# Altium PCB Headstage.PcbDoc
Units mil, origin at the board's own origin, x right, y up, seen from the top; angles counter-clockwise.
Board outline 4600 x 4600 mil, 4 copper layers (Top Copper Layer, Internal Copper Layer 1, Internal Copper Layer 2, Bottom Copper Layer), stack 62.205 mil thick; 15 components, 96 nets, 242 pads, 19 vias.
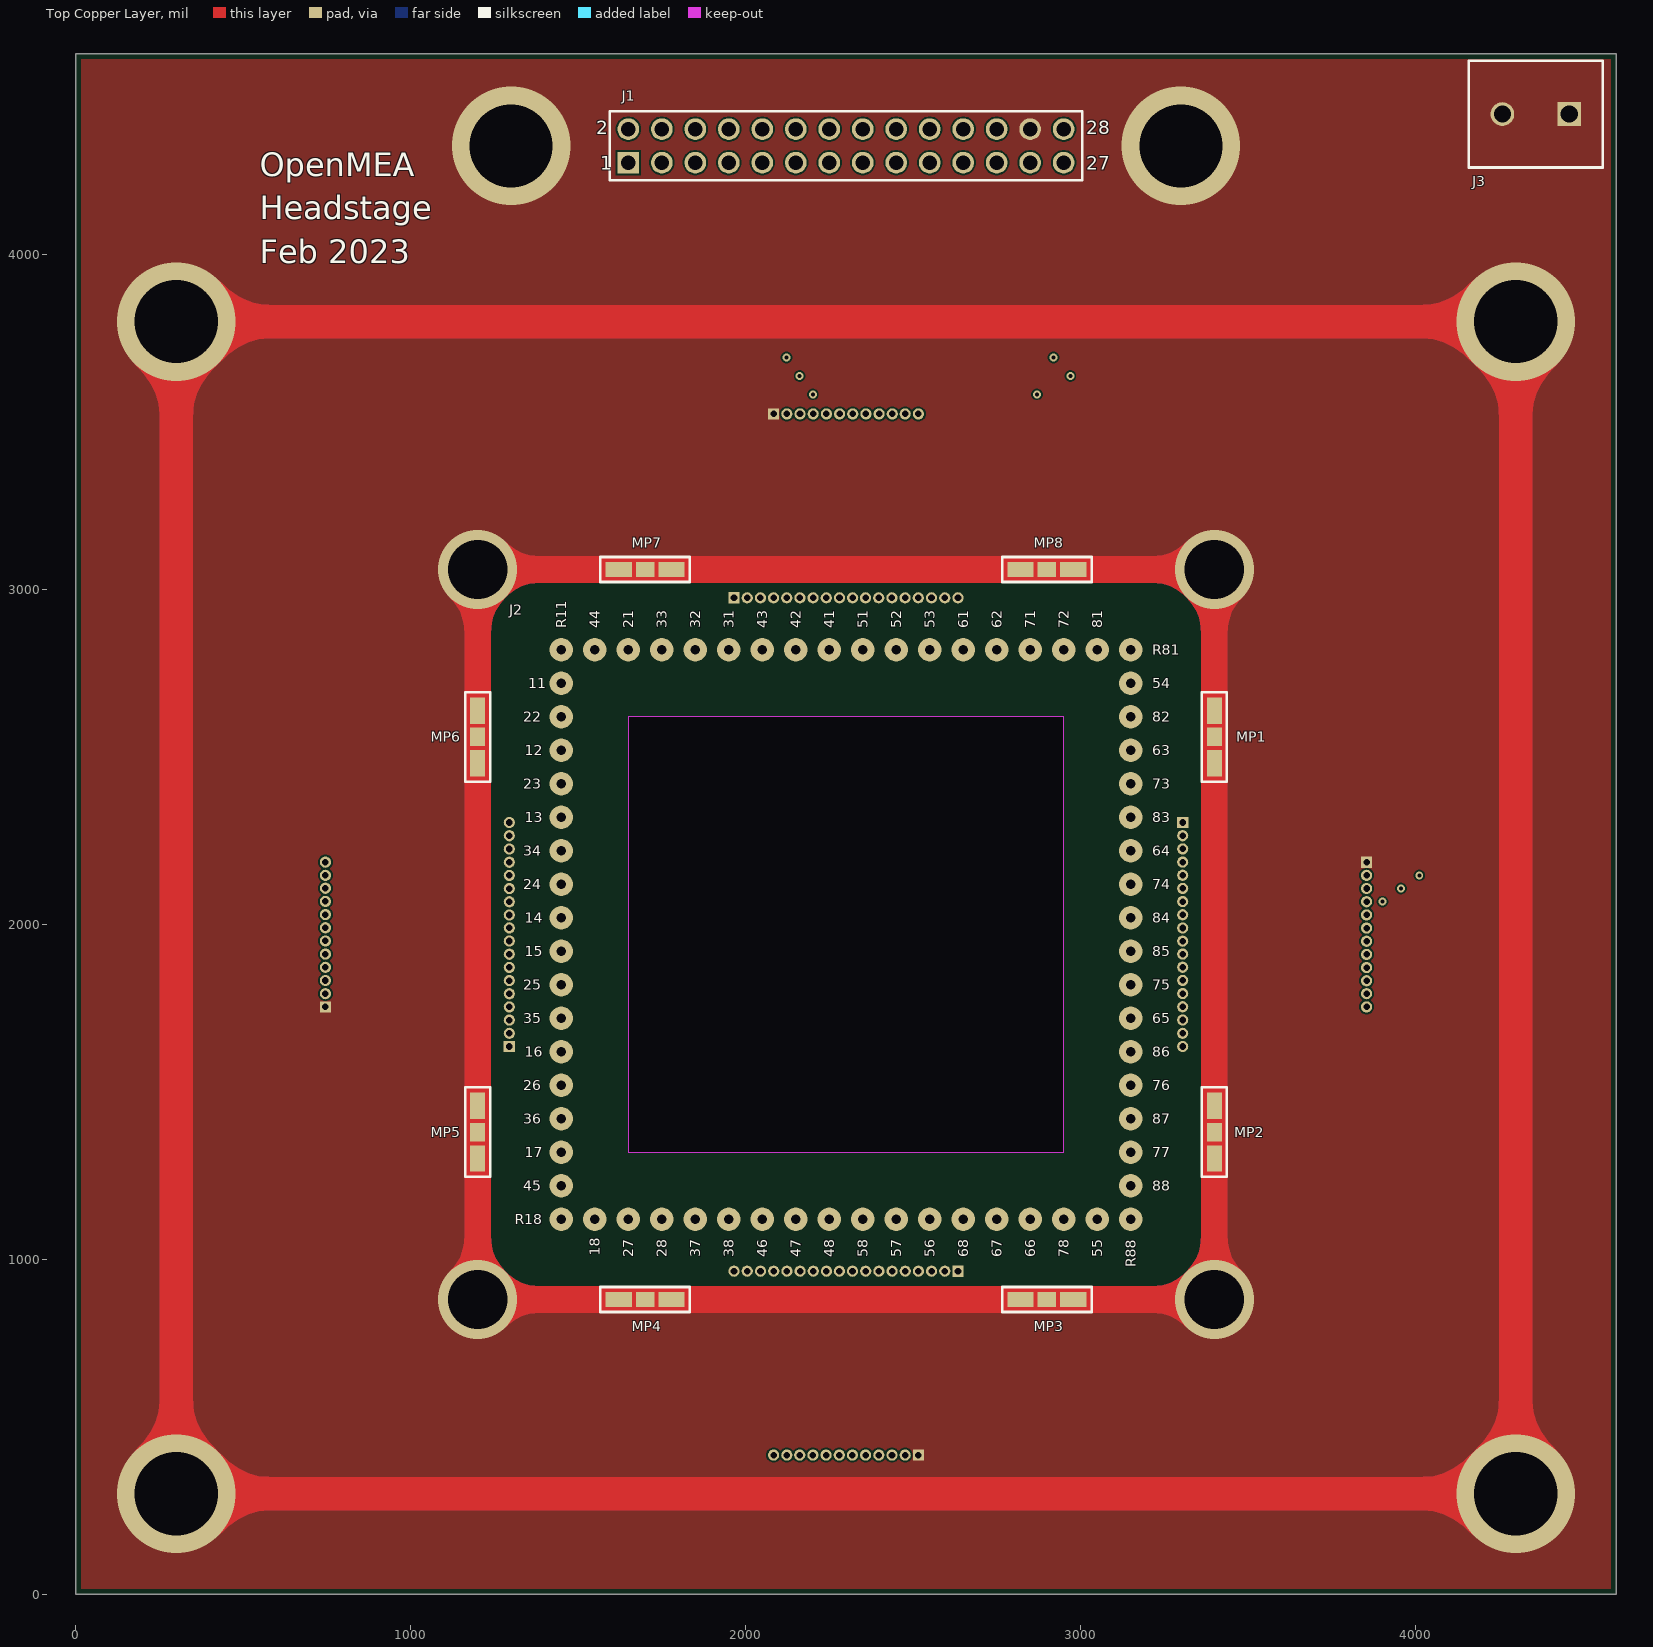
[diagram p0: Top Copper Layer view]
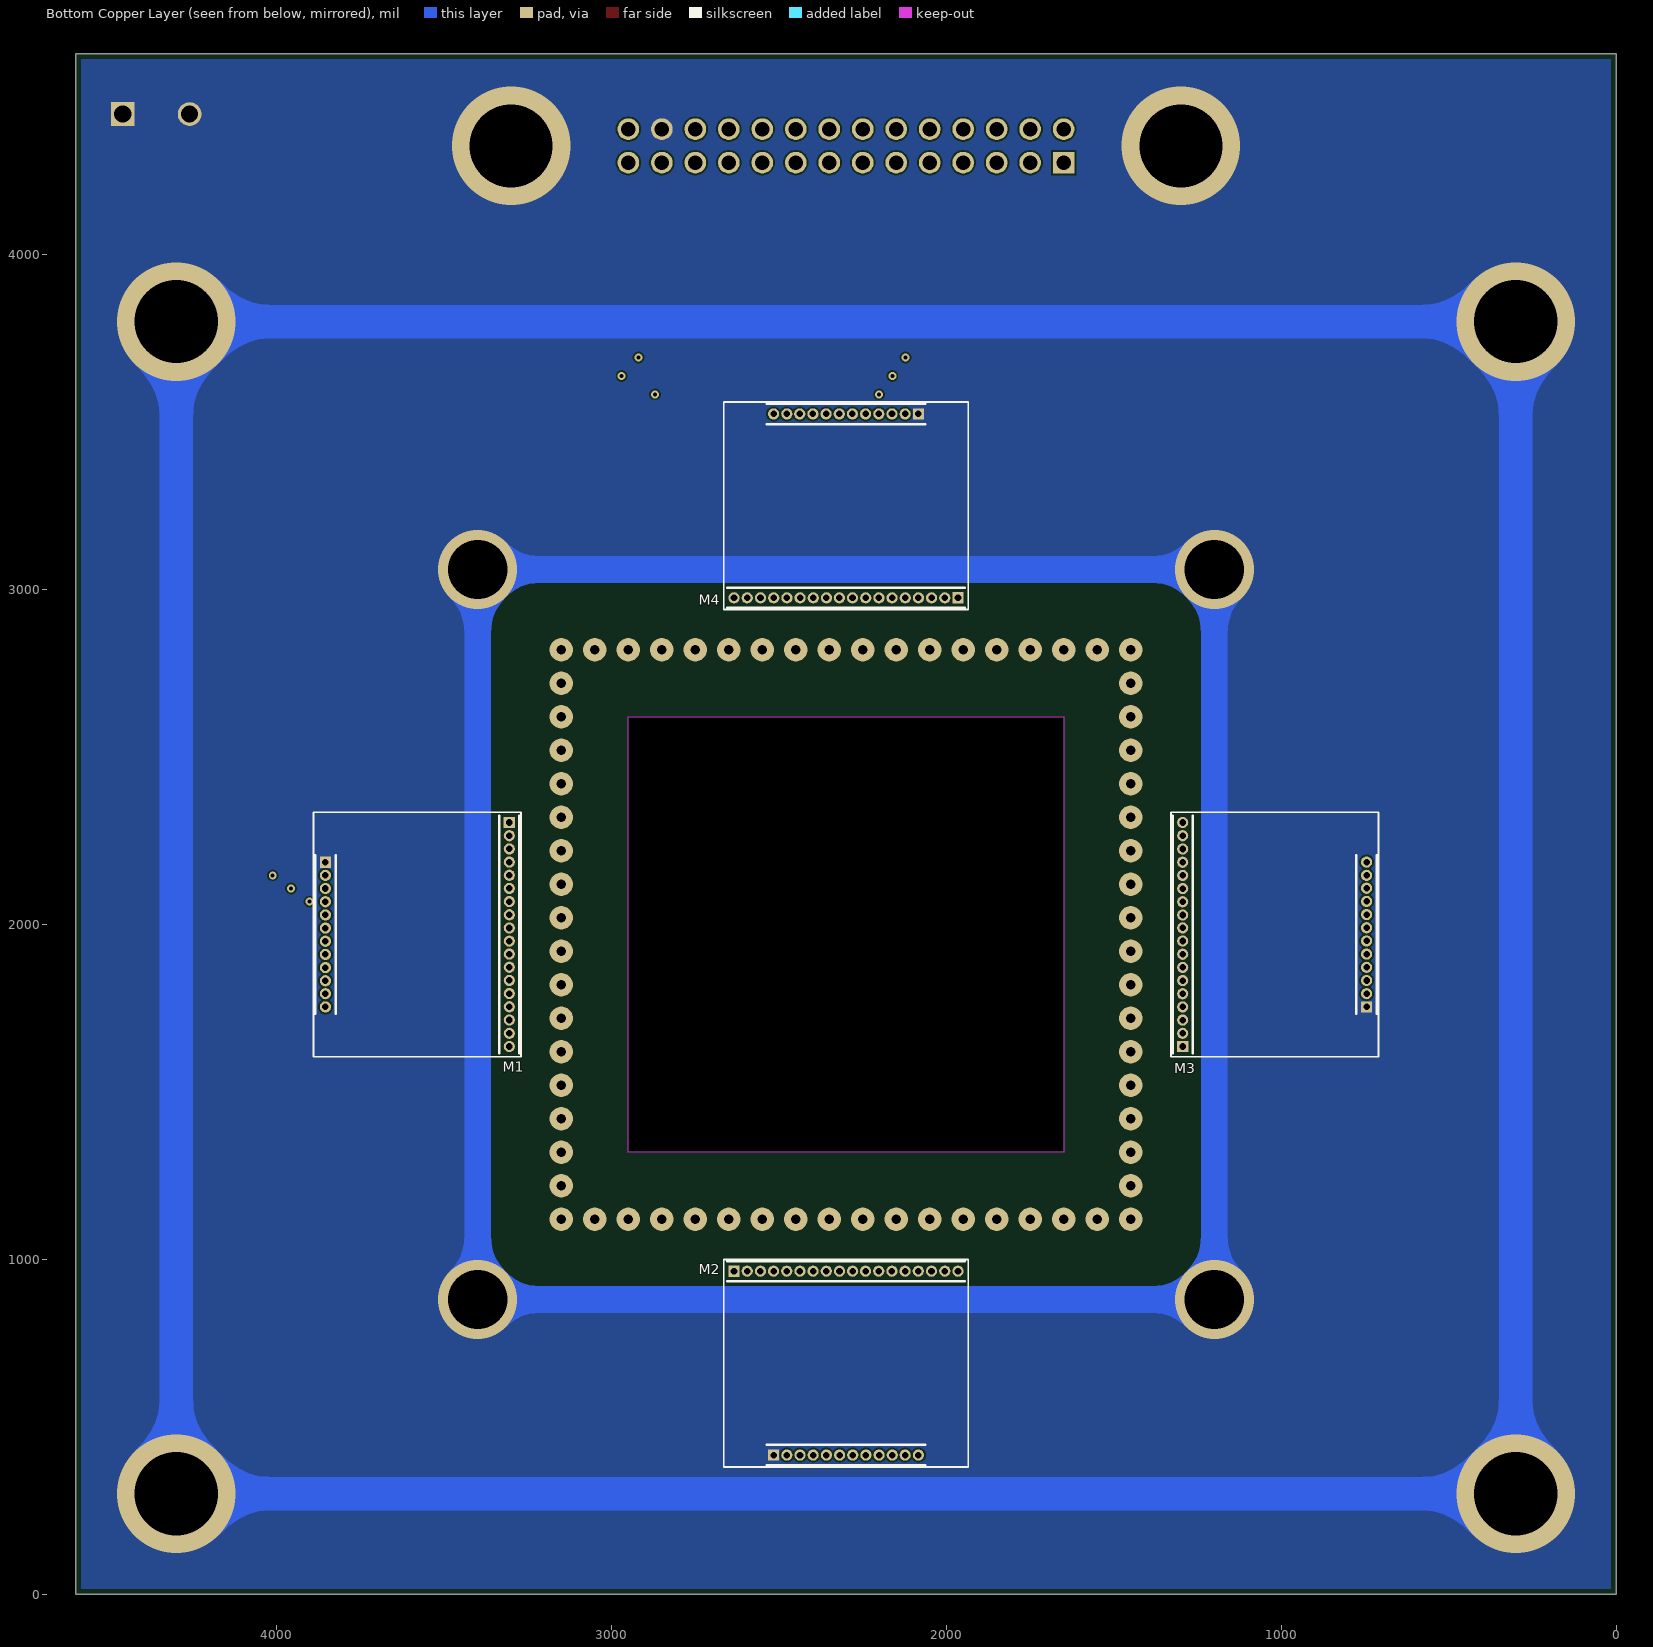
[diagram p1: Bottom Copper Layer view, seen from below]
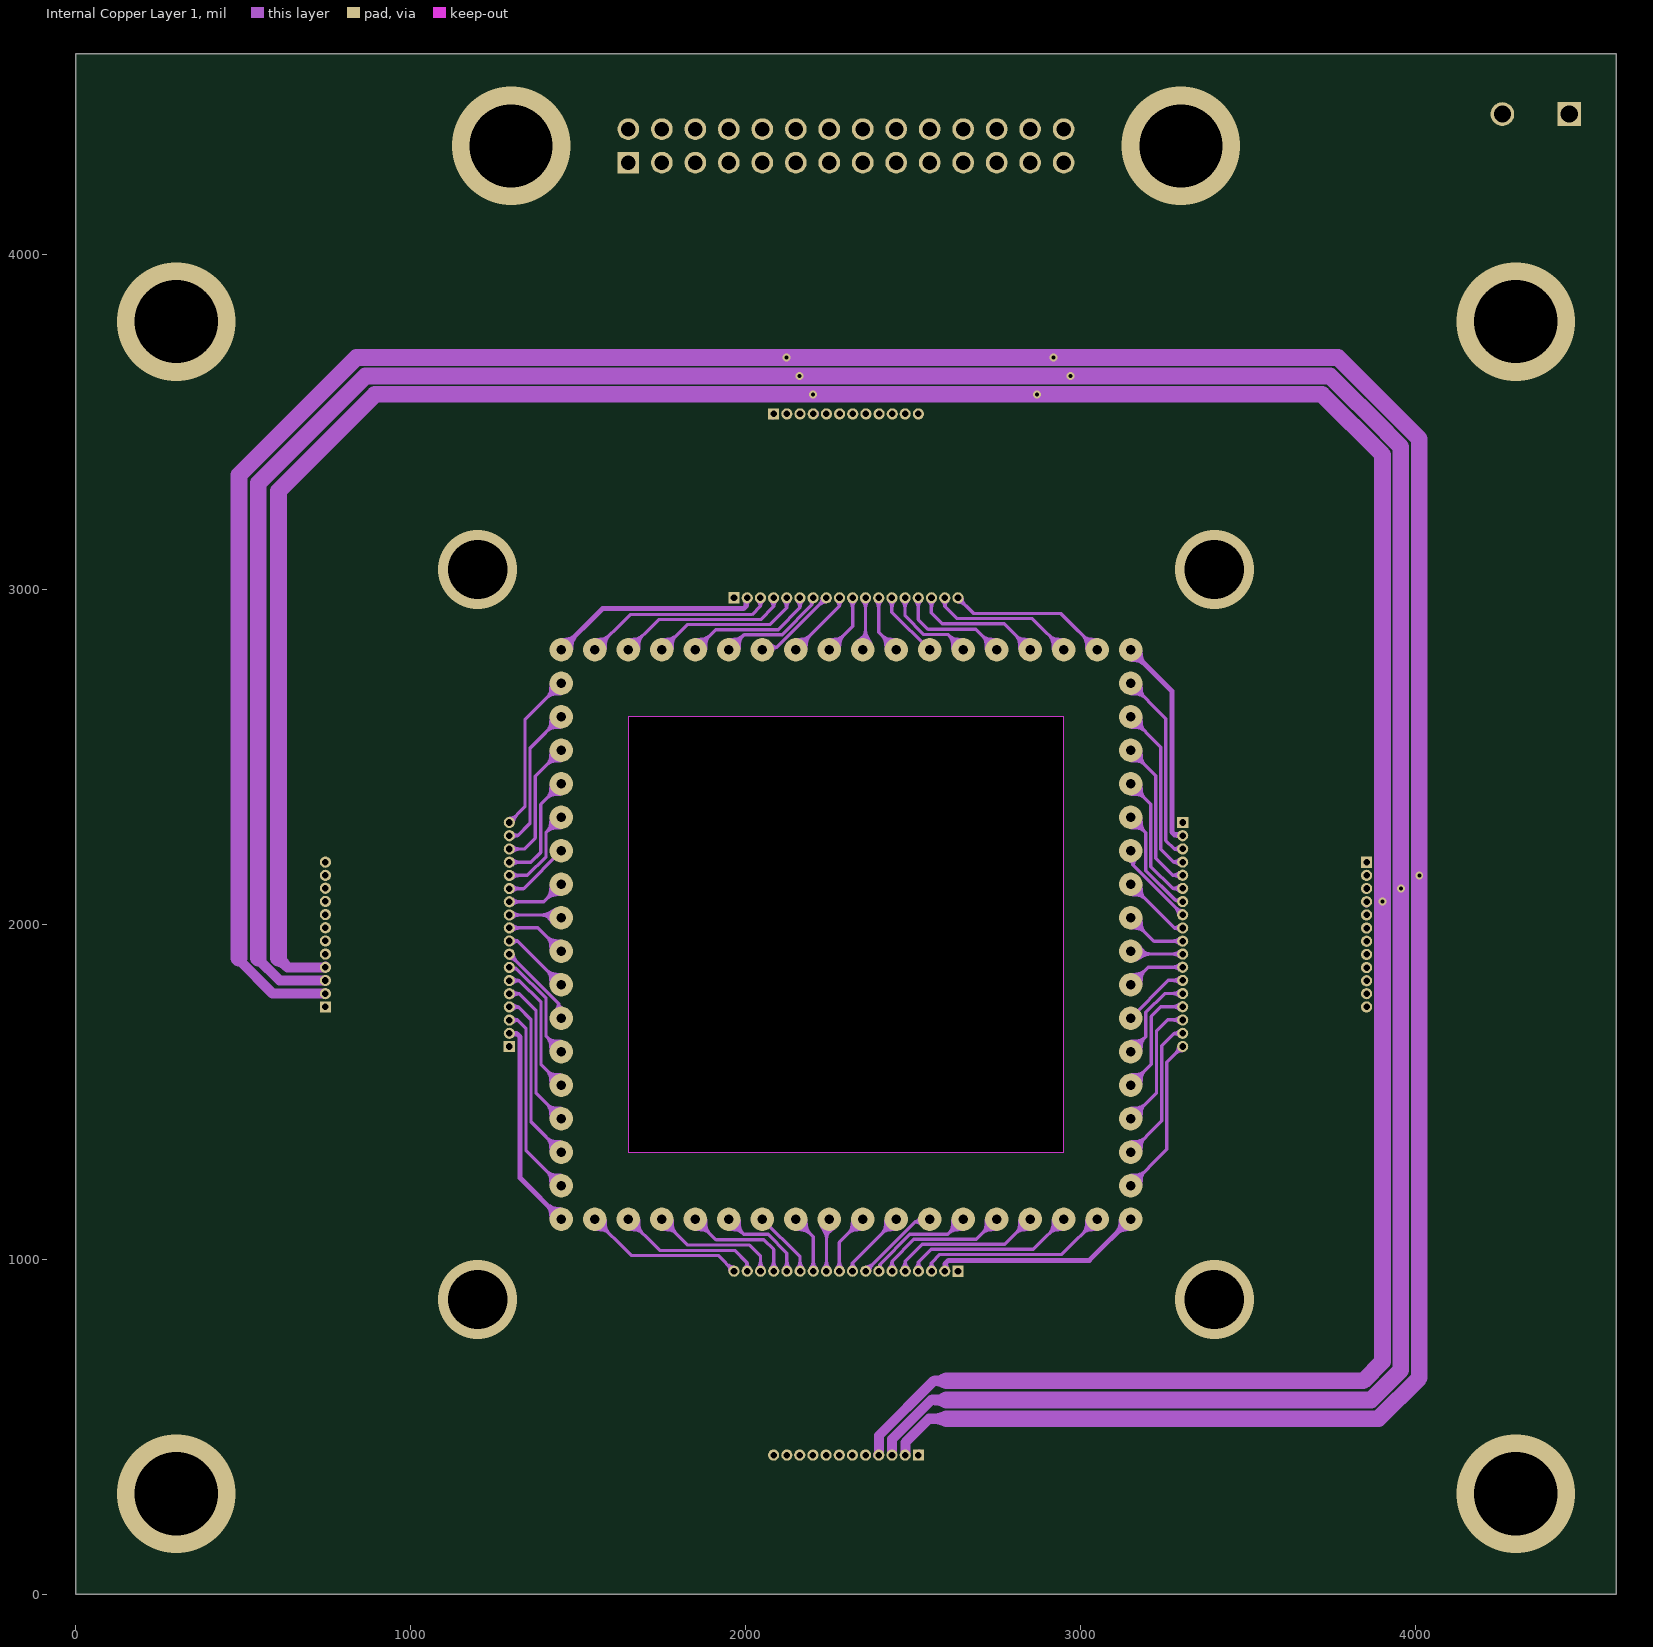
[diagram p2: Internal Copper Layer 1]
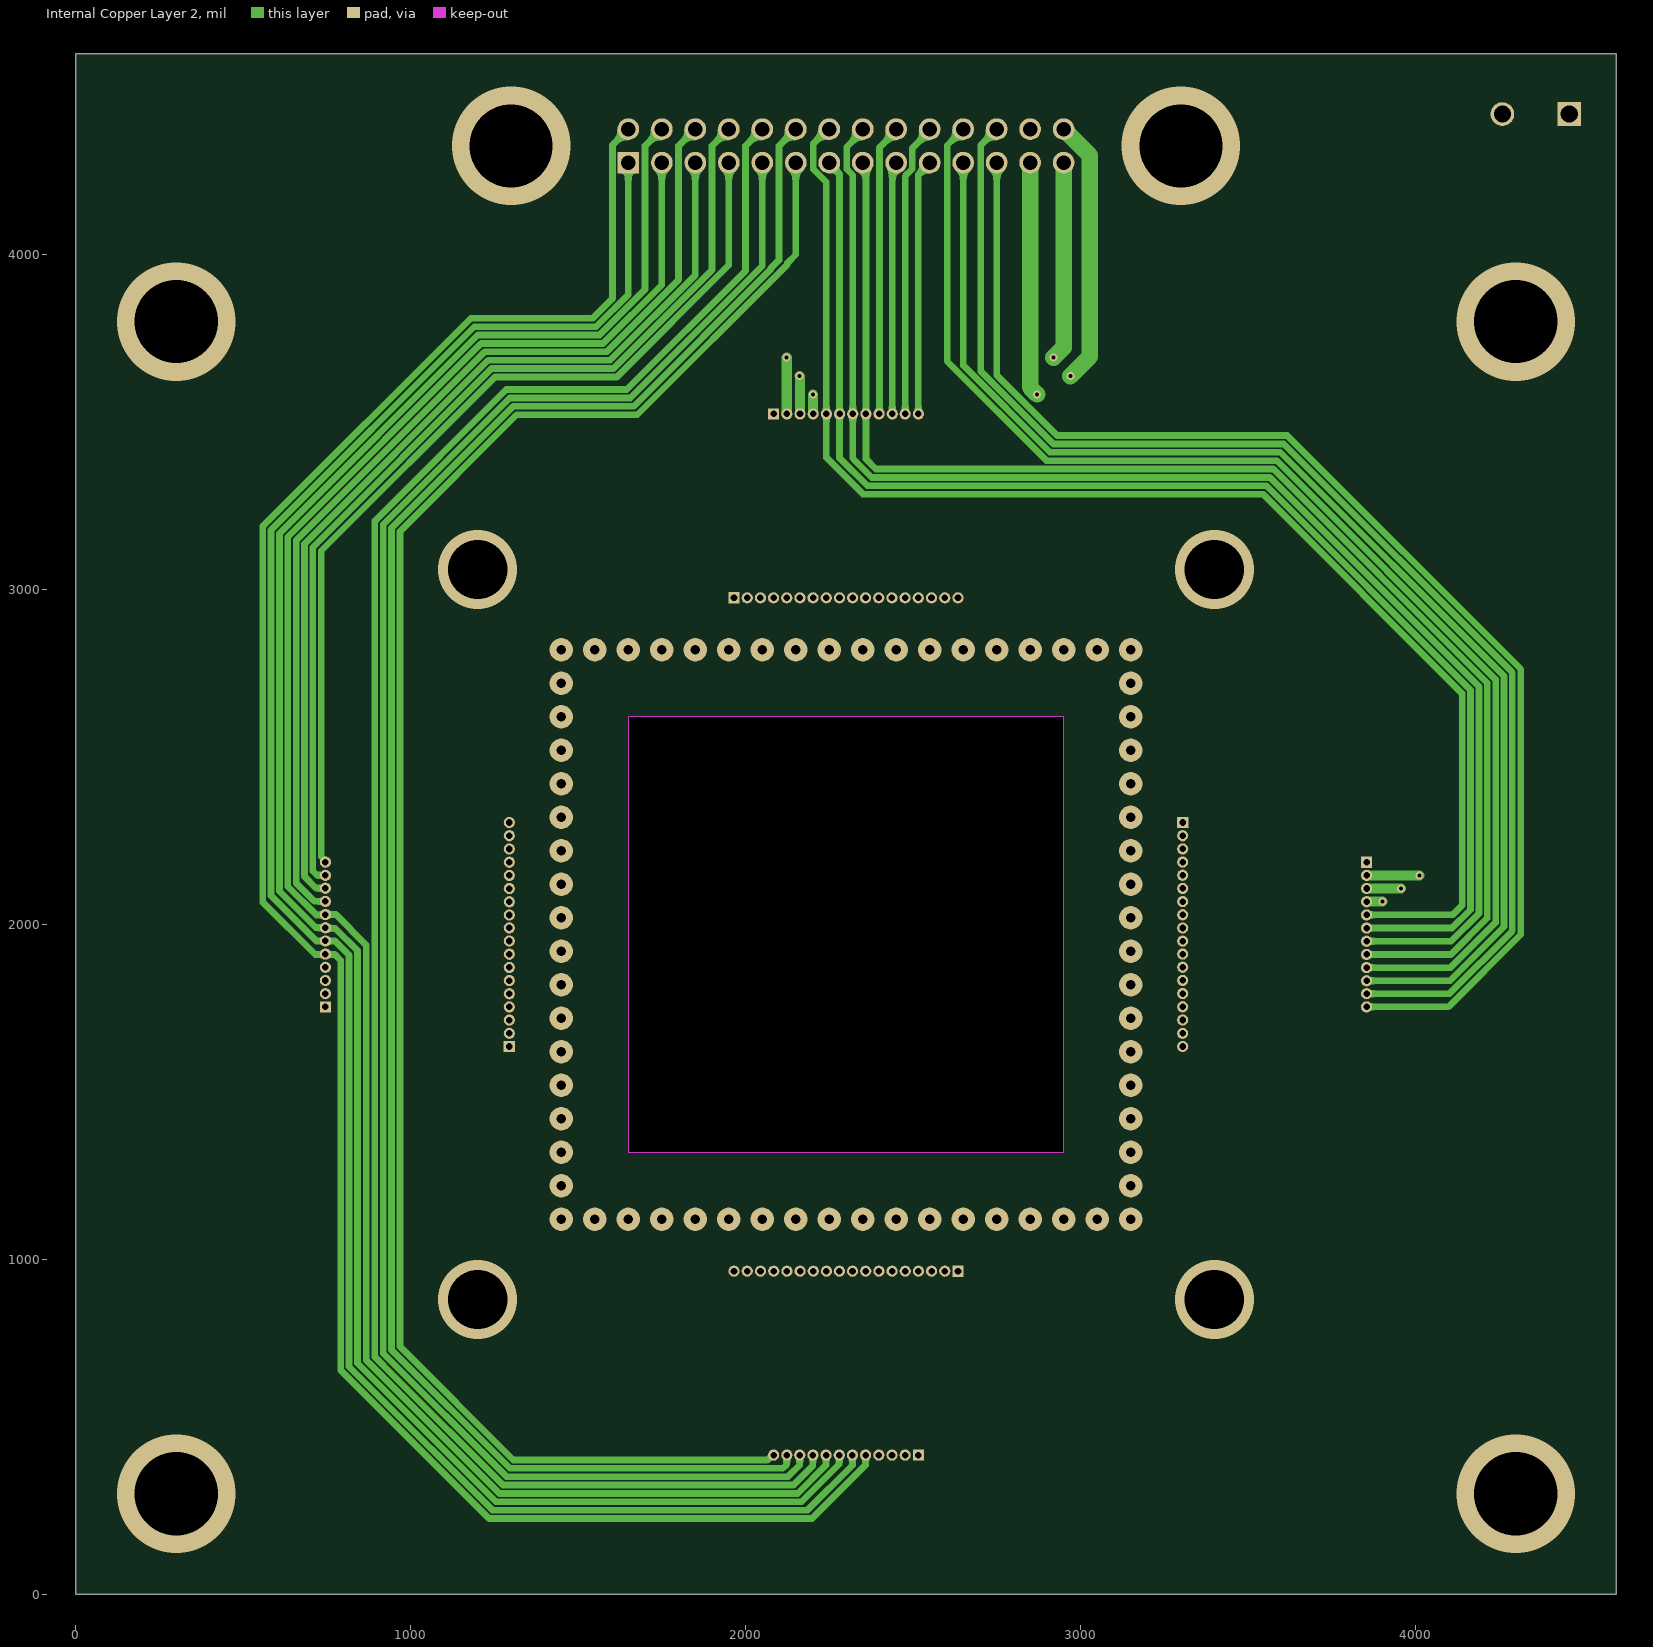
[diagram p3: Internal Copper Layer 2]

## Layer stack, top to bottom
Top Solder: solder mask 0.3937, Solder Resist, Dk 3.5
Top Copper Layer: signal copper 1.378
Dielectric 1: prepreg 8.6614, FR-4, Dk 4.2
Internal Copper Layer 1: signal copper 1.378
Dielectric 2: core 39.3701, FR-4, Dk 4.2
Internal Copper Layer 2: signal copper 1.378
Dielectric 3: prepreg 8.6614, FR-4, Dk 4.2
Bottom Copper Layer: signal copper 1.378
Bottom Solder: solder mask 0.3937, Solder Resist, Dk 3.5

## Board outline
0,0 4600,0 4600,4600 0,4600
cut-out: 2950,2620 1650,2620 1650,1320 2950,1320

## Design rules (kind name [scope] priority, off if disabled: settings)
BoardOutlineClearance [All] p1: gap=15.75 ignorepadtopadclearanceinfootprint=FALSE
Clearance [All] p1: gap=5 ignorepadtopadclearanceinfootprint=TRUE
ComponentClearance [All] p1: gap=5.91 collisioncheckmode=3 verticalgap=5.91 showdistances=FALSE
HoleSize [All] p1: absolutevalues=TRUE maxlimit=248.03 minlimit=9.84 maxpercent=80.000 minpercent=20.000
HoleToHoleClearance [All] p1: gap=17.72 allowstackedmicrovias=TRUE
MinimumAnnularRing [All] p1: minimumring=5.91
MinimumSolderMaskSliver [All] p1: minsoldermaskwidth=5.91
PlaneClearance [All] p1: clearance=5.91
PlaneConnect [All] p1: planeconnectstyle=Relief reliefexpansion=9.84 reliefentries=4 reliefconductorwidth=5.91 reliefairgap=5.91
PolygonConnect [All] p1: connectstyle=Direct reliefconductorwidth=5.91 reliefentries=4 polygonreliefangle="90 Angle" airgapwidth=5.91
RoomDefinition Headstage [InComponentClass('Headstage')] p1 off: confinementstyle=ConfineIn formatcopy=TRUE lockcomponents=FALSE outline 0,0 2000,0 2000,1000 0,1000
RoutingVias [All] p1: holewidth=9.84 width=21.65 viastyle="Through Hole" minholewidth=9.84 minwidth=21.65 maxholewidth=248.03 maxwidth=354.33
SilkToSilkClearance [All] p1: silktosilkclearance=5
SilkToSolderMaskClearance [IsPad] p1: minsilkscreentomaskgap=7.87 clearancetoexposedcopper=TRUE
SolderMaskExpansion [All] p1: expansion=5.91 istentingtop=FALSE
Width [All] p1: maxlimit=1968.5 minlimit=5.91 preferedwidth=5.91
22 further rules are at their usual default settings.

## Components (designator, comment, footprint, x,y, rotation, side; value= is the part's Value field where it differs from the comment)
J1 "61302821121" 61302821121 2300,4325 r0 top
J2 "POGO_PINS_64_4_V01" POGO_PINS_64_4_V01 2300,1970 r0 top locked
J3 "1729128" PHOE-1729128-2_V 4360,4420 r180 top
M1 "Intan_RHS2116_Module" INTAN_RHS2116_MODULE#1 3580,1970 r270 bottom locked
M2 "Intan_RHS2116_Module" INTAN_RHS2116_MODULE#2 2300,690 r180 bottom locked
M3 "Intan_RHS2116_Module" INTAN_RHS2116_MODULE#2 1020,1970 r90 bottom locked
M4 "Intan_RHS2116_Module" INTAN_RHS2116_MODULE#3 2300,3250 r0 bottom
MP1 "S0971-46R" FP-S0971-46R-MFG 3400,2560 r90 top locked
MP2 "S0971-46R" FP-S0971-46R-MFG 3400,1380 r90 top locked
MP3 "S0971-46R" FP-S0971-46R-MFG 2900,880 r180 top locked
MP4 "S0971-46R" FP-S0971-46R-MFG 1700,880 r180 top locked
MP5 "S0971-46R" FP-S0971-46R-MFG 1200,1380 r90 top locked
MP6 "S0971-46R" FP-S0971-46R-MFG 1200,2560 r90 top locked
MP7 "S0971-46R" FP-S0971-46R-MFG 1700,3060 r180 top locked
MP8 "S0971-46R" FP-S0971-46R-MFG 2900,3060 r180 top locked

## Footprints (in the part's own frame and the unit in brackets; to place one, negate y for a bottom-side part, rotate by r counter-clockwise, add the part's x,y. Pads: shape width x height; smd on the part's side, far side on the other; paste and mask are expansions set on the pad)
61302821121 [mm] "Pin Header, pitch 2.54 mm, THT, Vertical, dual row, 28p"
  rect 1.65x1.65 hole 1.1: 1(-16.51,-1.27)
  round 1.65 hole 1.1: 2(-16.51,1.27) 3(-13.97,-1.27) 4(-13.97,1.27) 5(-11.43,-1.27) 6(-11.43,1.27) 7(-8.89,-1.27) 8(-8.89,1.27) 9(-6.35,-1.27) 10(-6.35,1.27) 11(-3.81,-1.27) 12(-3.81,1.27) 13(-1.27,-1.27) 14(-1.27,1.27) 15(1.27,-1.27) 16(1.27,1.27) 17(3.81,-1.27) 18(3.81,1.27) 19(6.35,-1.27) 20(6.35,1.27) 21(8.89,-1.27) 22(8.89,1.27) 23(11.43,-1.27) 24(11.43,1.27) 25(13.97,-1.27) 26(13.97,1.27) 27(16.51,-1.27) 28(16.51,1.27)
  silkscreen extent -17.93,-2.62 17.93,2.62, body extent -17.78,-2.54 17.78,2.54, height 8.59
FP-S0971-46R-MFG [mm]
  rect 2x1.125 smd paste+0 mask+0: 1(-2,0) 1(2,0)
  rect 1.4x1.125 smd paste+0 mask+0: 1(0,0)
  silkscreen extent -3.4,-0.95 3.4,0.95, body extent -3.1,-0.66 3.1,0.66, height 0.25
INTAN_RHS2116_MODULE#1 [mm]
  rect 0.85x0.85 hole 0.5: 1(-5.488,-6.974) 13(-8.494,6.975)
  round 0.85 hole 0.5: 2(-4.488,-6.974) 3(-3.488,-6.974) 4(-2.488,-6.974) 5(-1.488,-6.974) 6(-0.488,-6.974) 7(0.512,-6.974) 8(1.512,-6.974) 9(2.512,-6.974) 10(3.512,-6.974) 11(4.489,-6.974) 12(5.489,-6.974) 14(-7.494,6.975) 15(-6.494,6.975) 16(-5.494,6.975) 17(-4.494,6.975) 18(-3.494,6.975) 19(-2.494,6.975) 20(-1.494,6.975) 21(-0.494,6.975) 22(0.506,6.975) 23(1.483,6.975) 24(2.483,6.975) 25(3.483,6.975) 26(4.483,6.975) 27(5.483,6.975) 28(6.483,6.975) 29(7.494,6.975) 30(8.494,6.975)
  Top Copper Layer lines w0.254: 5.483,6.975 5.463,6.955 ; 4.483,6.975 4.483,6.884 ; 1.483,6.975 1.483,6.813 ; -0.494,6.975 -0.38,6.86
  Top Copper Layer lines w0.381: 1.467,-6.885 1.534,-6.952 ; 0.467,-6.885 0.534,-6.952 ; -0.443,-6.892 -0.443,-6.974 ; -1.443,-6.892 -1.443,-6.974 ; 3.526,-6.944 3.534,-6.952 3.557,-6.974 ; 1.557,-6.974 1.534,-6.952 ; 0.557,-6.974 0.534,-6.952 ; 1.534,-6.952 1.534,-6.952 ; 0.534,-6.952 0.534,-6.952
  Internal Copper Layer 1 lines w0.635: -5.551,-6.867 -5.466,-6.952 -5.443,-6.974 ; -3.443,-6.916 -3.443,-6.974 ; -4.484,-6.933 -4.466,-6.952 ; -4.443,-6.974 -4.466,-6.952 ; -4.466,-6.952 -4.466,-6.952 ; -4.466,-6.952 -4.466,-6.952
  Internal Copper Layer 1 lines w0.762: -2.46,-6.958 -2.443,-6.974
  silkscreen extent -9.27,-7.88 9.27,7.86, body extent -9.27,-7.88 9.27,7.86, height 3.2
INTAN_RHS2116_MODULE#2 [mm]
  rect 0.85x0.85 hole 0.5: 1(-5.488,-6.974) 13(-8.494,6.975)
  round 0.85 hole 0.5: 2(-4.488,-6.974) 3(-3.488,-6.974) 4(-2.488,-6.974) 5(-1.488,-6.974) 6(-0.488,-6.974) 7(0.512,-6.974) 8(1.512,-6.974) 9(2.512,-6.974) 10(3.512,-6.974) 11(4.489,-6.974) 12(5.489,-6.974) 14(-7.494,6.975) 15(-6.494,6.975) 16(-5.494,6.975) 17(-4.494,6.975) 18(-3.494,6.975) 19(-2.494,6.975) 20(-1.494,6.975) 21(-0.494,6.975) 22(0.506,6.975) 23(1.483,6.975) 24(2.483,6.975) 25(3.483,6.975) 26(4.483,6.975) 27(5.483,6.975) 28(6.483,6.975) 29(7.494,6.975) 30(8.494,6.975)
  Top Copper Layer lines w0.254: 5.483,6.975 5.463,6.955 ; 4.483,6.884 4.483,6.975 ; 1.483,6.813 1.483,6.975 ; -0.38,6.86 -0.494,6.975
  Top Copper Layer lines w0.381: 3.557,-6.974 3.534,-6.952 ; 3.526,-6.944 3.534,-6.952 ; 1.557,-6.974 1.534,-6.952 ; 1.467,-6.885 1.534,-6.952 ; 0.557,-6.974 0.534,-6.952 ; 0.467,-6.885 0.534,-6.952 ; -0.443,-6.974 -0.443,-6.892 ; -1.443,-6.974 -1.443,-6.892 ; 3.534,-6.952 3.534,-6.952 ; 1.534,-6.952 1.534,-6.952 ; 0.534,-6.952 0.534,-6.952
  Internal Copper Layer 1 lines w0.635: -3.443,-6.974 -3.443,-6.916 ; -4.443,-6.974 -4.466,-6.952 ; -4.484,-6.933 -4.466,-6.952 ; -5.443,-6.974 -5.466,-6.952 -5.551,-6.867 ; -4.466,-6.952 -4.466,-6.952
  Internal Copper Layer 1 lines w0.762: -2.443,-6.974 -2.46,-6.958
  silkscreen extent -9.27,-7.88 9.27,7.86, body extent -9.27,-7.88 9.27,7.86, height 3.2
INTAN_RHS2116_MODULE#3 [mm]
  rect 0.85x0.85 hole 0.5: 1(-5.488,-6.974) 13(-8.494,6.975)
  round 0.85 hole 0.5: 2(-4.488,-6.974) 3(-3.488,-6.974) 4(-2.488,-6.974) 5(-1.488,-6.974) 6(-0.488,-6.974) 7(0.512,-6.974) 8(1.512,-6.974) 9(2.512,-6.974) 10(3.512,-6.974) 11(4.489,-6.974) 12(5.489,-6.974) 14(-7.494,6.975) 15(-6.494,6.975) 16(-5.494,6.975) 17(-4.494,6.975) 18(-3.494,6.975) 19(-2.494,6.975) 20(-1.494,6.975) 21(-0.494,6.975) 22(0.506,6.975) 23(1.483,6.975) 24(2.483,6.975) 25(3.483,6.975) 26(4.483,6.975) 27(5.483,6.975) 28(6.483,6.975) 29(7.494,6.975) 30(8.494,6.975)
  Top Copper Layer lines w0.254: -0.494,6.975 -0.38,6.86 ; 1.483,6.975 1.483,6.813 ; 4.483,6.975 4.483,6.884 ; 5.463,6.955 5.483,6.975
  Top Copper Layer lines w0.381: -1.443,-6.892 -1.443,-6.974 ; -0.443,-6.892 -0.443,-6.974 ; 0.467,-6.885 0.534,-6.952 ; 0.557,-6.974 0.534,-6.952 ; 1.467,-6.885 1.534,-6.952 ; 1.557,-6.974 1.534,-6.952 ; 3.526,-6.944 3.534,-6.952 ; 3.557,-6.974 3.534,-6.952 ; 0.534,-6.952 0.534,-6.952 ; 1.534,-6.952 1.534,-6.952 ; 3.534,-6.952 3.534,-6.952
  Internal Copper Layer 1 lines w0.635: -5.551,-6.867 -5.466,-6.952 -5.443,-6.974 ; -4.484,-6.933 -4.466,-6.952 -4.443,-6.974 ; -3.443,-6.916 -3.443,-6.974
  Internal Copper Layer 1 lines w0.762: -2.46,-6.958 -2.443,-6.974
  silkscreen extent -9.27,-7.88 9.27,7.86, body extent -9.27,-7.88 9.27,7.86, height 3.2
PHOE-1729128-2_V [mm] "Receptacle, 2-Leads, Body 8.1x10.16mm, Pitch 5.08mm"
  rect 1.8x1.8 hole 1.3: 1(-2.54,0)
  round 1.8 hole 1.3: 2(2.54,0)
  silkscreen extent -5.08,-4.05 5.08,4.05, body extent -5.65,-4.05 5.08,4.05, height 10.01
POGO_PINS_64_4_V01 [mil]
  round 70 hole 29: 11(-850,750) 12(-850,550) 13(-850,350) 14(-850,50) 15(-850,-50) 16(-850,-350) 17(-850,-650) 18(-750,-850) 21(-650,850) 22(-850,650) 23(-850,450) 24(-850,150) 25(-850,-150) 26(-850,-450) 27(-650,-850) 28(-550,-850) 31(-350,850) 32(-450,850) 33(-550,850) 34(-850,250) 35(-850,-250) 36(-850,-550) 37(-450,-850) 38(-350,-850) 41(-50,850) 42(-150,850) 43(-250,850) 44(-750,850) 45(-850,-750) 46(-250,-850) 47(-150,-850) 48(-50,-850) 51(50,850) 52(150,850) 53(250,850) 54(850,750) 55(750,-850) 56(250,-850) 57(150,-850) 58(50,-850) 61(350,850) 62(450,850) 63(850,550) 64(850,250) 65(850,-250) 66(550,-850) 67(450,-850) 68(350,-850) 71(550,850) 72(650,850) 73(850,450) 74(850,150) 75(850,-150) 76(850,-450) 77(850,-650) 78(650,-850) 81(750,850) 82(850,650) 83(850,350) 84(850,50) 85(850,-50) 86(850,-350) 87(850,-550) 88(850,-750) R11(-850,850) R18(-850,-850) R81(850,850) R88(850,-850)
  body extent -886,-886 886,886, height 87

## Part data
J1: library part CMP-1502-01115-1, "THT Vertical Pin Header WR-PHD, Pitch 2.54 mm, Dual Row, 28 pins", Contact Resistance=20mOhm, Manufacturer="Wurth Elektronik", Operating Temperature=-40to105degC, Rated Current=3A, Withstanding Voltage=500VAC, Working Voltage=250VAC, Datasheet URL=https://katalog.we-online.de/em/datasheet/6130xx21121.pdf, Gender=Male, Manufacturer URL=http://www.we-online.de, Mounting Technology=THT, Orientation=Vertical, Package Reference=61302821121, Packaging=Bag, Part Number=61302821121, Pin Number=28, Pitch=2.54mm, Publisher=WurthElektronik, Row Number=Dual
J2: "Pogo pins, 64 recording, 4 reference, v01"
J3: library part CMP-2000-05815-1, "PCB Terminal Block, 13.5 A, 400 V, 2-Pin THD, RoHS, Bulk", Current Rating=13500mA, Manufacturer="Phoenix Contact", Package Description="2-Pin Through Hole Device, Body 8.1 x 10.16 mm, Pitch 5.08 mm", Package Reference=1729128-2, Package Version=03/2015, Voltage Rating=400V, Datasheet URL=https://datasheet.ciiva.com/16046/1729128-16046181.pdf, Datasheet Version=12/2013, Manufacturer URL=http://www.phoenixcontact.com/, Mounting Technology=ThroughHole, No. of Positions=2, No. of Rows=1, Orientation=Horizontal, Package URL=https://www.phoenixcontact.com/online/portal/pi/pxc/product_detail_page/!ut/p/b1/3VdJjqNKFDxLH8AFycySyWY2ozFsEPOMMQaDOX1XedGL_1Vdm5YXJleknhSKeBkvI6EA8ncAo3AYoDhBQGco6KN7VURTdemj9us_IEKEZo_YHiPAEWEFmDGOHMORkqKYCORBZxgL7ZoaZYcbFFUZ3fqxSY6GOuxydWUuHqz1ynmMFygu583Bob0Ewr6Sd_l-5m-kAueHiB0jpRwZwe58wwtkpxtMYd_LmGcDRU02dRNEyWt6Y2ti5pSyJ_reIkzIulrqApdnbT11V5jnCKbYNCvhEM1MCpPByat_X379-iThf08CI5GfOPqfBeS3BRoBOdD55AKVv0iLwCMq-2BrzXWSGRH7pUGD9uwXQjiph3xL0DKQwdGa0JImiIOmBNOestqgwTHSSs2oOep-78apyXQBvNi8ZLaFjvjWvcaUEBu0MC6Wbe-d6mB0FAebo2lUWinqYaZs5DAYzV0RP9yitUjnGJ0iI9xhZkT42OCQNUJJhkgWINNQLP2JFP6OpMg3JCVg70jqHT0lvKOnhHf0lPuOnnLf0VPuWx6_dxwUIvwk5WMkT0kLL1mh61l2yZVSzG3pYV_bqo-mj6uMKwKwdnnW8Jh5RTOJzMOA5c-eJDaZQw4mTMPH02PvS_ZAqNVjVTo2WyYLkwH_KU1mmmG5kjRhDqPXLwwVHvVOjCM60-fpXvTDfMGW1PVFVS1r4e4yVDk4ZdNbkUHvqPqQSeian4UD39fNKmachqdJ1NJbyk8rXT9mXTvPk3oE5meulKGgiruPJek-4I9hTT6G8ZLOyRSm2RRVbThERQad5OS28hdt4YW4vG0stgYYzsWsK4_7y6DZMjJSCqri1kyiZR5vD7pwIrNR7QwPHTcLTI5qT7eRlpHrdGiupYlqQDJ7zy_CND8fWWBoLRXxk1RVcXiBQwbTD4Xi7KL-FuO94t9xaqweXzH, Packing=Bulk, PartNumber=1729128, Pitch=5.08mm, RoHS=TRUE
MP1 MP2 MP3 MP4 MP5 MP6 MP7 MP8: library part CMP-15817-000004-1, "RFI SHIELD CLIP MINI TIN SMD", Manufacturer=Harwin, Temperature="-25°C to +150°C", Temperature Range High=+150°C, Temperature Range Low=-25°C, Automotive=No, Category=UNK, ComponentLink2Description=Datasheet, ComponentLink2URL=https://cdn.harwin.com/pdfs/S0971-46R.pdf, Conn Orientation=Vertical, Contact Material=Tin,Nickel, Device Class L1=Connectors, Device Class L2=unset, Device Class L3=unset, Digikey Description="RFI SHIELD CLIP MINI TIN SMD", Height=2.1mm, Is Female=yes, Lead Free=Yes, Manufacturer Part Number=S0971-46R, Mouser Description="EZ-Shield Clip, SMT, Mini, Stainless Steel, tin, Tape & Reeled", Number Of Contacts=1, Octopart=https://octopart.com/s0971-46r-harwin-30988305, Package=S0971-46R, RoHS=TRUE

## Via types
v1: diameter 23.62, hole 11.81, Top Copper Layer to Bottom Copper Layer, 9 vias
v2: diameter 354.33, hole 248.03, Top Copper Layer to Bottom Copper Layer, 6 vias
v3: diameter 236.22, hole 177.17, Top Copper Layer to Bottom Copper Layer, 4 vias

## Nets (pads, with @x,y where several pads share a name; then routed paths per layer and width w, separated by ;. In a path a pad name is that pad's centre, name@x,y a point inside that pad or via, vN(x,y) a via of type N, cw(c..) or ccw(c..) an arc to the next point about the centre after c; other vN are vias at no path point)
E1_0: J2.54 M1.15 | length 573.4
  Internal Copper Layer 1 w10: J2.54@3149.68,2720.17 3255.34,2614.51 3255.34,2250.59 3280.07,2225.85 M1.15@3305.09,2225.85
E1_1: J2.82 M1.16 | length 513.7
  Internal Copper Layer 1 w10: J2.82@3149.68,2620.17 3240.34,2529.51 3240.34,2224.59 3278.44,2186.48 M1.16@3305.09,2186.48
E1_2: J2.63 M1.17 | length 454.6
  Internal Copper Layer 1 w10: J2.63@3149.68,2520.17 3225.34,2444.51 3225.34,2197.59 3275.81,2147.11 M1.17@3305.09,2147.11
E1_3: J2.73 M1.18 | length 394.3
  Internal Copper Layer 1 w10: J2.73@3149.68,2420.17 3210.34,2359.51 3210.34,2172.59 3275.18,2107.74 M1.18@3305.09,2107.74
E1_4: J2.83 M1.19 | length 326.3
  Internal Copper Layer 1 w10: J2.83@3149.68,2320.17 3195.34,2274.51 3195.34,2160.8 3283.99,2072.15 3301.31,2072.15 M1.19@3305.09,2068.37
E1_5: J2.64 M1.20 | length 255.5
  Internal Copper Layer 1 w10: J2.64@3149.68,2220.17 3157.57,2212.28 3157.57,2176.52 M1.20@3305.09,2029
E1_6: J2.74 M1.21 | length 209.5
  Internal Copper Layer 1 w10: J2.74@3149.68,2120.17 3279.91,1989.94 3304.78,1989.94 M1.21@3305.09,1989.63
E1_7: J2.84 M1.22 | length 184.4
  Internal Copper Layer 1 w10: J2.84@3149.68,2020.17 3219.59,1950.26 M1.22@3305.09,1950.26
E1_8: J2.85 M1.23 | length 158.9
  Internal Copper Layer 1 w10: J2.85@3149.68,1920.17 3158.05,1911.8 M1.23@3305.09,1911.8
E1_9: J2.75 M1.24 | length 176.9
  Internal Copper Layer 1 w10: J2.75@3149.89,1819.96 3202.37,1872.43 M1.24@3305.09,1872.43
E1_10: J2.65 M1.25 | length 202.2
  Internal Copper Layer 1 w10: J2.65@3149.68,1720.17 3262.56,1833.06 M1.25@3305.09,1833.06
E1_11: J2.86 M1.26 | length 269.4
  Internal Copper Layer 1 w10: J2.86@3149.68,1620.17 3195.07,1665.08 3195.47,1665.47 3195.47,1737.68 3251.47,1793.69 M1.26@3305.09,1793.69
E1_12: J2.76 M1.27 | length 336.4
  Internal Copper Layer 1 w10: J2.76@3149.68,1520.17 3211.34,1581.84 3211.34,1725.27 3240.39,1754.32 M1.27@3305.09,1754.32
E1_13: J2.87 M1.28 | length 385.5
  Internal Copper Layer 1 w10: J2.87@3149.68,1420.17 3227.34,1497.84 3227.34,1682.16 3260.12,1714.95 M1.28@3305.09,1714.95
E1_14: J2.77 M1.29 | length 433.6
  Internal Copper Layer 1 w10: J2.77@3149.68,1320.17 3243.34,1413.84 3243.34,1637.82 3280.12,1674.61 3304.57,1674.61 M1.29@3305.09,1675.12
E1_15: J2.88 M1.30 | length 480
  Internal Copper Layer 1 w10: J2.88@3149.68,1220.17 3258.34,1328.84 3258.34,1589 M1.30@3305.09,1635.75
E1_REF: J2.R81 M1.14 | length 631.9
  Internal Copper Layer 1 w15: J2.R81@3149.68,2820.17 3272.84,2697.01 3272.84,2579.33 3272.84,2276.03 3281.62,2267.24 3303.07,2267.24 M1.14@3305.09,2265.22
E2_0: J2.55 M2.15 | length 573.4
  Internal Copper Layer 1 w10: M2.15@2555.6,964.84 2555.6,989.85 2580.34,1014.59 2944.26,1014.59 J2.55@3049.93,1120.25
E2_1: J2.78 M2.16 | length 513.7
  Internal Copper Layer 1 w10: M2.16@2516.23,964.84 2516.23,991.48 2554.34,1029.59 2859.26,1029.59 J2.78@2949.93,1120.25
E2_2: J2.66 M2.17 | length 454.6
  Internal Copper Layer 1 w10: M2.17@2476.86,964.84 2476.86,994.11 2527.34,1044.59 2774.26,1044.59 J2.66@2849.93,1120.25
E2_3: J2.67 M2.18 | length 394.3
  Internal Copper Layer 1 w10: M2.18@2437.49,964.84 2437.49,994.74 2502.34,1059.59 2689.26,1059.59 J2.67@2749.93,1120.25
E2_4: J2.68 M2.19 | length 326.3
  Internal Copper Layer 1 w10: M2.19@2398.12,964.84 2401.9,968.61 2401.9,985.94 2490.55,1074.59 2604.26,1074.59 J2.68@2649.93,1120.25
E2_5: J2.56 M2.20 | length 255.5
  Internal Copper Layer 1 w10: M2.20@2358.75,964.84 2506.27,1112.36 2542.03,1112.36 J2.56@2549.93,1120.25
E2_6: J2.57 M2.21 | length 209.5
  Internal Copper Layer 1 w10: M2.21@2319.38,964.84 2319.69,965.14 2319.69,990.01 J2.57@2449.93,1120.25
E2_7: J2.58 M2.22 | length 184.4
  Internal Copper Layer 1 w10: M2.22@2280.01,964.84 2280.01,1050.34 J2.58@2349.93,1120.25
E2_8: J2.48 M2.23 | length 158.9
  Internal Copper Layer 1 w10: M2.23@2241.55,964.84 2241.55,1111.87 J2.48@2249.93,1120.25
E2_9: J2.47 M2.24 | length 176.9
  Internal Copper Layer 1 w10: J2.47@2149.71,1120.03 2202.18,1067.56 M2.24@2202.18,964.84
E2_10: J2.46 M2.25 | length 202.2
  Internal Copper Layer 1 w10: J2.46@2049.93,1120.25 2162.81,1007.37 M2.25@2162.81,964.84
E2_11: J2.38 M2.26 | length 269.4
  Internal Copper Layer 1 w10: J2.38@1949.92,1120.25 1994.83,1074.85 1995.22,1074.45 2067.43,1074.45 2123.44,1018.45 M2.26@2123.44,964.84
E2_12: J2.37 M2.27 | length 336.4
  Internal Copper Layer 1 w10: J2.37@1849.92,1120.25 1911.59,1058.59 2055.02,1058.59 2084.07,1029.54 M2.27@2084.07,964.84
E2_13: J2.28 M2.28 | length 385.5
  Internal Copper Layer 1 w10: J2.28@1749.92,1120.25 1827.59,1042.59 2011.91,1042.59 2044.7,1009.8 M2.28@2044.7,964.84
E2_14: J2.27 M2.29 | length 433.6
  Internal Copper Layer 1 w10: J2.27@1649.92,1120.25 1743.59,1026.59 1967.57,1026.59 2004.36,989.8 2004.36,965.35 M2.29@2004.88,964.84
E2_15: J2.18 M2.30 | length 480
  Internal Copper Layer 1 w10: J2.18@1549.92,1120.25 1658.59,1011.59 1918.75,1011.59 M2.30@1965.51,964.84
E2_REF: J2.R88 M2.14 | length 631.9
  Internal Copper Layer 1 w15: M2.14@2594.97,964.84 2596.99,966.85 2596.99,988.3 2605.78,997.09 2909.08,997.09 3026.76,997.09 J2.R88@3149.93,1120.25
E3_0: J2.45 M3.15 | length 573.4
  Internal Copper Layer 1 w10: M3.15 1319.6,1714.32 1344.34,1689.59 1344.34,1325.66 J2.45
E3_1: J2.17 M3.16 | length 513.7
  Internal Copper Layer 1 w10: M3.16 1321.23,1753.69 1359.34,1715.59 1359.34,1410.66 J2.17
E3_2: J2.36 M3.17 | length 454.6
  Internal Copper Layer 1 w10: M3.17 1323.86,1793.06 1374.34,1742.59 1374.34,1495.66 J2.36
E3_3: J2.26 M3.18 | length 394.3
  Internal Copper Layer 1 w10: M3.18 1324.49,1832.43 1389.34,1767.59 1389.34,1580.66 J2.26
E3_4: J2.16 M3.19 | length 326.3
  Internal Copper Layer 1 w10: M3.19 1298.36,1868.03 1315.69,1868.03 1404.34,1779.37 1404.34,1665.66 J2.16
E3_5: J2.35 M3.20 | length 255.5
  Internal Copper Layer 1 w10: M3.20 1442.11,1763.65 1442.11,1727.89 J2.35
E3_6: J2.25 M3.21 | length 209.5
  Internal Copper Layer 1 w10: M3.21 1294.89,1950.24 1319.76,1950.24 J2.25
E3_7: J2.15 M3.22 | length 184.4
  Internal Copper Layer 1 w10: M3.22 1380.09,1989.91 J2.15
E3_8: J2.14 M3.23 | length 158.9
  Internal Copper Layer 1 w10: M3.23 1441.62,2028.38 J2.14
E3_9: J2.24 M3.24 | length 176.9
  Internal Copper Layer 1 w10: M3.24 1397.31,2067.75 J2.24@1449.78,2120.22
E3_10: J2.34 M3.25 | length 202.2
  Internal Copper Layer 1 w10: M3.25 1337.12,2107.12 J2.34
E3_11: J2.13 M3.26 | length 269.4
  Internal Copper Layer 1 w10: M3.26 1348.2,2146.49 1404.21,2202.49 1404.21,2274.7 1404.6,2275.1 J2.13
E3_12: J2.23 M3.27 | length 336.4
  Internal Copper Layer 1 w10: M3.27 1359.29,2185.86 1388.34,2214.91 1388.34,2358.34 J2.23
E3_13: J2.12 M3.28 | length 385.5
  Internal Copper Layer 1 w10: M3.28 1339.55,2225.23 1372.34,2258.01 1372.34,2442.34 J2.12
E3_14: J2.22 M3.29 | length 433.6
  Internal Copper Layer 1 w10: M3.29 1295.11,2265.57 1319.55,2265.57 1356.34,2302.35 1356.34,2526.34 J2.22
E3_15: J2.11 M3.30 | length 480
  Internal Copper Layer 1 w10: M3.30 1341.34,2351.17 1341.34,2611.34 J2.11
E3_REF: J2.R18 M3.14 | length 631.9
  Internal Copper Layer 1 w15: M3.14 1296.61,1672.93 1318.05,1672.93 1326.84,1664.15 1326.84,1360.84 1326.84,1243.16 J2.R18
E4_0: J2.44 M4.15 | length 573.4
  Internal Copper Layer 1 w10: J2.44@1549.75,2819.93 1655.41,2925.59 2019.34,2925.59 2044.07,2950.32 M4.15@2044.07,2975.34
E4_1: J2.21 M4.16 | length 513.7
  Internal Copper Layer 1 w10: J2.21@1649.75,2819.93 1740.41,2910.59 2045.34,2910.59 2083.44,2948.69 M4.16@2083.44,2975.34
E4_2: J2.33 M4.17 | length 454.6
  Internal Copper Layer 1 w10: J2.33@1749.75,2819.93 1825.41,2895.59 2072.34,2895.59 2122.81,2946.06 M4.17@2122.81,2975.34
E4_3: J2.32 M4.18 | length 394.3
  Internal Copper Layer 1 w10: J2.32@1849.75,2819.92 1910.41,2880.59 2097.34,2880.59 2162.18,2945.43 M4.18@2162.18,2975.34
E4_4: J2.31 M4.19 | length 326.3
  Internal Copper Layer 1 w10: J2.31@1949.75,2819.93 1995.41,2865.59 2109.12,2865.59 2197.78,2954.24 2197.78,2971.56 M4.19@2201.55,2975.34
E4_5: J2.43 M4.20 | length 255.5
  Internal Copper Layer 1 w10: J2.43@2049.75,2819.93 2057.64,2827.82 2093.4,2827.82 M4.20@2240.92,2975.34
E4_6: J2.42 M4.21 | length 209.5
  Internal Copper Layer 1 w10: J2.42@2149.75,2819.93 2279.99,2950.16 2279.99,2975.03 M4.21@2280.29,2975.34
E4_7: J2.41 M4.22 | length 184.4
  Internal Copper Layer 1 w10: J2.41@2249.75,2819.92 2319.66,2889.84 M4.22@2319.66,2975.34
E4_8: J2.51 M4.23 | length 158.9
  Internal Copper Layer 1 w10: J2.51@2349.75,2819.92 2358.13,2828.3 M4.23@2358.13,2975.34
E4_9: J2.52 M4.24 | length 176.9
  Internal Copper Layer 1 w10: M4.24@2397.5,2975.34 2397.5,2872.62 J2.52@2449.97,2820.14
E4_10: J2.53 M4.25 | length 202.2
  Internal Copper Layer 1 w10: M4.25@2436.87,2975.34 2436.87,2932.81 J2.53@2549.75,2819.93
E4_11: J2.61 M4.26 | length 269.4
  Internal Copper Layer 1 w10: M4.26@2476.24,2975.34 2476.24,2921.72 2532.24,2865.72 2604.45,2865.72 2604.85,2865.32 J2.61@2649.75,2819.93
E4_12: J2.62 M4.27 | length 336.4
  Internal Copper Layer 1 w10: M4.27@2515.61,2975.34 2515.61,2910.64 2544.66,2881.59 2688.09,2881.59 J2.62@2749.75,2819.92
E4_13: J2.71 M4.28 | length 385.5
  Internal Copper Layer 1 w10: M4.28@2554.98,2975.34 2554.98,2930.37 2587.76,2897.59 2772.09,2897.59 J2.71@2849.75,2819.93
E4_14: J2.72 M4.29 | length 433.6
  Internal Copper Layer 1 w10: M4.29@2594.8,2975.34 2595.32,2974.82 2595.32,2950.37 2632.11,2913.59 2856.09,2913.59 J2.72@2949.75,2819.93
E4_15: J2.81 M4.30 | length 480
  Internal Copper Layer 1 w10: M4.30@2634.17,2975.34 2680.92,2928.59 2941.09,2928.59 J2.81@3049.75,2819.93
E4_REF: J2.R11 M4.14 | length 631.9
  Internal Copper Layer 1 w15: J2.R11@1449.75,2819.93 1572.91,2943.09 1690.59,2943.09 1993.9,2943.09 2002.68,2951.87 2002.68,2973.32 M4.14@2004.7,2975.34
GND: J1.26 J3.1 J3.2 M1.1 M2.1 M3.1 M4.1 MP1.1 MP2.1 MP3.1 MP4.1 MP5.1 MP6.1 MP7.1 MP8.1 | length 47614.7
  Top Copper Layer w80: v3(1200,880) v3(1200,3060) v3(3400,3060) v3(3400,880) v3(1200,880)
  Top Copper Layer w100: v2@4286,3814 v2(4300,3800) ; v2@4307.85,3830 v2@4324.33,3813.52 ; v2(4300,3800) v2(4300,300) v2(300,300) v2(300,3800) v2(4300,3800)
  Bottom Copper Layer w80: v3(1200,880) v3(1200,3060) v3(3400,3060) v3(3400,880) v3(1200,880)
  Bottom Copper Layer w100: v2@272.44,3810 v2@292.44,3830 ; v2@4307.85,3830 v2@4324.33,3813.52 ; v2(300,300) v2(300,3800) v2(4300,3800) v2(4300,300) v2(300,300)
  other v2: 1300,4325 3300,4325
M1_MISON: J1.24 M1.11 | length 4005.5
  Internal Copper Layer 2 w20: J1.24@2758.75,4383.16 2702,4326.41 2702,3652.71 2919.71,3435 3607.13,3435 4290.02,2752.11 4290.02,1981.02 4102.29,1793.29 M1.11@3848.37,1793.29
M1_MISOP: J1.23 M1.12 | length 3907.2
  Internal Copper Layer 2 w20: J1.23@2750.41,4276.48 2750.41,3639.65 2930.07,3460 3617.49,3460 4315.02,2762.47 4315.02,1970.02 4098.92,1753.92 M1.12
M1_MOSIN: J1.22 M1.9 | length 3910.9
  Internal Copper Layer 2 w20: J1.22 2650,4374.41 2602.52,4326.93 2602.52,3681.48 2899,3385 3586.42,3385 4240.02,2731.4 4240.02,2006.02 4105.12,1871.12 M1.9
M1_MOSIP: J1.21 M1.10 | length 3830.9
  Internal Copper Layer 2 w20: J1.21 2650.41,4274.59 2650.41,3668.94 2909.36,3410 3596.78,3410 4265.02,2741.75 4265.02,1993.02 4103.75,1831.75 M1.10
M2_MISON: J1.12 M2.11 | length 5715.8
  Internal Copper Layer 2 w20: M2.11 2123.29,387.72 2111.57,376 1296.13,376 943,729.13 943,3184.11 1306.12,3547.24 1666.12,3547.24 2075,3956.11 2075,3958.94 2100,3983.94 2100,4325 J1.12
M2_MISOP: J1.11 M2.12 | length 5498.1
  Internal Copper Layer 2 w20: M2.12 2080.27,415.41 2065.86,401 1306.49,401 968,739.49 968,3173.76 1316.48,3522.24 1676.48,3522.24 2125,3970.76 2125,3975 2150,4000 J1.11
M2_MOSIN: J1.10 M2.9 | length 5894
  Internal Copper Layer 2 w20: J1.10@2060.9,4385.9 2000,4325 2000,3951.82 1645.41,3597.24 1285.41,3597.24 893,3204.82 893,708.42 948,653.42 1275.42,326 2143,326 2201.12,384.12 M2.9
M2_MOSIP: J1.9 M2.10 | length 5676.1
  Internal Copper Layer 2 w20: J1.9 2050,3966.47 1655.77,3572.24 1295.77,3572.24 918,3194.47 918,718.78 1285.78,351 2127,351 2161.75,385.75 M2.10
M3_MISON: J1.8 M3.11 | length 2986.2
  Internal Copper Layer 2 w20: M3.11@745.33,2146.63 744.85,2147.1 719.72,2147.1 708,2158.82 708,3126.36 1241.64,3660 1605.64,3660 1900,3954.36 1900,4325 J1.8
M3_MISOP: J1.7 M3.12 | length 2811.4
  Internal Copper Layer 2 w20: M3.12 745.41,2189.73 733,2202.14 733,3116 1252,3635 1616,3635 1950,3969 J1.7
M3_MOSIN: J1.6 M3.9 | length 3082.2
  Internal Copper Layer 2 w20: M3.9 713.12,2068.88 658,2124 658,3147.07 1220.93,3710 1584.93,3710 1800,3925.07 1800,4325 J1.6 J1.6@1859.86,4384.86
M3_MOSIP: J1.5 M3.10 | length 2905.4
  Internal Copper Layer 2 w20: M3.10 717.72,2108.25 683,2142.96 683,3136.71 1231.29,3685 1595.29,3685 1850,3939.71 J1.5
M4_MISON: J1.20 M4.11 | length 899.3
  Internal Copper Layer 2 w20: M4.11@2476.71,3523.71 2476.71,4234.57 2497.48,4255.33 2497.48,4317.48 J1.20@2566.03,4386.03
M4_MISOP: J1.19 M4.12 | length 764.5
  Internal Copper Layer 2 w20: M4.12 2516.08,4238.58 2550,4272.5 J1.19
M4_MOSIN: J1.18 M4.9 | length 874.6
  Internal Copper Layer 2 w20: M4.9@2400,3524.59 2400,4320 J1.18@2455.97,4375.97
M4_MOSIP: J1.17 M4.10 | length 755.3
  Internal Copper Layer 2 w20: M4.10 2438.25,4251.08 2450,4262.83 J1.17
M14_CSN: J1.14 M1.5 M4.5 | length 4122
  Internal Copper Layer 2 w20: J1.14@2236,4366 2202.52,4332.52 2202.52,4255.33 2241.4,4216.45 M4.5 2241.4,3394.6 2351,3285 3545,3285 4140.02,2689.98 4140.02,2057.02 4111.6,2028.6 M1.5
M14_CSP: J1.13 M1.6 M4.6 | length 4055.2
  Internal Copper Layer 2 w20: J1.13 2250,4271.57 2280.77,4240.8 M4.6 2280.77,3393.23 2364,3310 3555.36,3310 4165.02,2700.33 4165.02,2044.02 4110.23,1989.23 M1.6
M14_SCLKN: J1.16 M1.7 M4.7 | length 4223.5
  Internal Copper Layer 2 w20: J1.16@2363.33,4383.33 2302.52,4322.52 2302.52,4255.33 2320.14,4237.71 M4.7 2320.14,3391.86 2377,3335 3565.71,3335 4190.02,2710.69 4190.02,2033.02 4106.86,1949.86 M1.7
M14_SCLKP: J1.15 M1.8 M4.8 | length 4129.3
  Internal Copper Layer 2 w20: J1.15 2350,4262.83 2359.51,4253.33 M4.8 2359.51,3389.49 2389,3360 3576.07,3360 4215.02,2721.04 4215.02,2019.02 4106.49,1910.49 M1.8
M23_CSN: J1.2 M2.5 M3.5 | length 6342.8
  Internal Copper Layer 2 w20: J1.2@1645.14,4370.14 1602.52,4327.52 1602.52,3869.01 1543.51,3810 1179.51,3810 558,3188.49 558,2067 715,1910 774,1910 791,1893 791,669 1234,226 2199,226 2358.6,385.6 M2.5
M23_CSP: J1.1 M2.6 M3.6 | length 6141.6
  Internal Copper Layer 2 w20: J1.1@1650,4270 1650,3881.13 1553.87,3785 1189.87,3785 583,3178.13 583,2086 718.23,1950.77 774.23,1950.77 816,1909 816,679.36 873,622.36 1244.36,251 2185,251 2319.23,385.23 M2.6
M23_SCLKN: J1.4 M2.7 M3.7 | length 6198.3
  Internal Copper Layer 2 w20: M3.7 716.86,1990.14 608,2099 608,3167.78 1200.22,3760 1564.22,3760 1700,3895.78 1700,4325 J1.4 J1.4@1761.16,4386.16 ; M3.7@748,1984.76 751.56,1988.32 774.68,1988.32 841,1922 841,689.71 1254.71,276 2167,276 2279.86,388.86 M2.7
M23_SCLKP: J1.3 M2.8 M3.8 | length 5987.9
  Internal Copper Layer 2 w20: J1.3@1750,4275.21 1750,3910.42 1574.58,3735 1210.58,3735 633,3157.42 633,2113.64 718.23,2028.41 744.32,2028.41 M3.8 776.49,2029.51 867,1939 867,699.07 923,643.07 1265.07,301 2156,301 2240.49,385.49 M2.8
VDD: J1.25 M1.4 M2.4 M3.4 M4.4 | length 10206.7
  Internal Copper Layer 1 w30: 605,1900 632.97,1872.03 M3.4 ; M2.4 2398.64,416.08 2398.64,473.64 2562.08,637.08 2600,637.08
  Internal Copper Layer 1 w50: 605,1900 605,3295 893,3583 v1(2201.03,3583) 2871.03,3583 3722,3583 3902,3403 v1(3902,2067.97) 3902,694.37 3844.71,637.08 2600,637.08
  Internal Copper Layer 2 w30: v1(2201.03,3583) 2201.36,3582.66 2201.36,3525.25 M4.4 ; M1.4 v1(3902,2067.97)
  Internal Copper Layer 2 w50: J1.25 2850,3604.03 v1@2871.03,3583
  other v1: 2870,3583
VSTIMN: J1.27 M1.2 M2.2 M3.2 M4.2 | length 10892.1
  Internal Copper Layer 1 w30: 487,1900 487,1894.36 588.07,1793.29 M3.2 ; M2.2 2477.38,416.08 2477.38,453.38 2547.99,524 2600,524
  Internal Copper Layer 1 w50: 487,1900 487,3342 838,3693 3769,3693 3950,3512 3950,3511.78 4012,3449.78 v1(4012,2146.71) 4012,646 3890,524 2600,524
  Internal Copper Layer 2 w30: v1(2122.29,3693) 2123,3692.29 M4.2@2123,3524.59 ; M1.2 v1(4012,2146.71)
  Internal Copper Layer 2 w50: v1(2920,3693) 2950,3723 J1.27@2950,4270.95
VSTIMP: J1.28 M1.3 M2.3 M3.3 M4.3 | length 10700.4
  Internal Copper Layer 1 w30: 545,1900 545,1896.36 608.7,1832.66 M3.3 ; M2.3 2438.01,416.08 2438.01,463.51 2554.5,580 2600,580
  Internal Copper Layer 1 w50: 545,1900 545,3318 865,3638 3746,3638 3917,3467 3917,3465.78 3957,3425.78 v1(3957,2107.34) 3957,669 3868,580 2600,580
  Internal Copper Layer 2 w30: v1(2161.66,3638) 2162.66,3637 M4.3 ; M1.3 v1(3957,2107.34)
  Internal Copper Layer 2 w50: J1.28 3028,4297 3028,3696 v1(2970,3638)
pads on no net: M1.13 M2.13 M3.13 M4.13

## Polygon pours and split planes (outlines as drawn)
GND on Top Copper Layer "GND_L01_P008" (solid, pour order 8): 4600,0 0,0 0,4600 4600,4600
GND on Bottom Copper Layer "GND_L04_P009" (solid, pour order 9): 0,0 4600,0 4600,4600 0,4600

## Other copper
Top Copper Layer:
  pour cut-out: 3400,880 3400,3060 1200,3060 1200,880
Bottom Copper Layer:
  pour cut-out: 3400,880 3400,3060 1200,3060 1200,880

## Silkscreen, mask and mechanical layers (free items; w line width, h text height)
Top Overlay:
  text "OpenMEA" at 550,4211.18 h120
  text "Headstage" at 550,4082.57 h120
  text "Feb 2023" at 550,3951.33 h120

## Text inside footprints (layer, text, board x,y; h text height)
J1: Top Overlay "1" at 1566.14,4254.13 h40; Top Overlay "2" at 1554.33,4360.43 h40; Top Overlay "27" at 3018.11,4254.13 h40; Top Overlay "28" at 3018.11,4360.43 h40
J2: Top Overlay "R18" at 1310.97,1105 h30; Top Overlay "R88" at 3165,975.97 h30 r90; Top Overlay "81" at 3065,2884.06 h30 r90; Top Overlay "88" at 3214.06,1205 h30; Top Overlay "72" at 2964.99,2884.06 h30 r90; Top Overlay "71" at 2865,2884.06 h30 r90; Top Overlay "62" at 2764.99,2884.06 h30 r90; Top Overlay "61" at 2665,2884.06 h30 r90; Top Overlay "53" at 2564.99,2884.06 h30 r90; Top Overlay "52" at 2464.99,2884.06 h30 r90; Top Overlay "51" at 2365,2884.06 h30 r90; Top Overlay "41" at 2265,2884.05 h30 r90; Top Overlay "42" at 2165,2884.05 h30 r90; Top Overlay "43" at 2065,2884.05 h30 r90; Top Overlay "31" at 1965,2884.05 h30 r90; Top Overlay "32" at 1865,2884.05 h30 r90; Top Overlay "33" at 1765,2884.05 h30 r90; Top Overlay "21" at 1665,2884.05 h30 r90; Top Overlay "44" at 1565,2884.05 h30 r90; Top Overlay "55" at 3065,1005.96 h30 r90; Top Overlay "78" at 2965,1005.96 h30 r90; Top Overlay "66" at 2865,1005.96 h30 r90; Top Overlay "67" at 2765,1005.96 h30 r90; Top Overlay "68" at 2665,1005.96 h30 r90; Top Overlay "56" at 2565,1005.96 h30 r90; Top Overlay "57" at 2465,1005.96 h30 r90; Top Overlay "58" at 2365,1005.96 h30 r90; Top Overlay "48" at 2265,1005.96 h30 r90; Top Overlay "47" at 2165,1005.96 h30 r90; Top Overlay "46" at 2065,1005.96 h30 r90; Top Overlay "38" at 1965,1005.96 h30 r90; Top Overlay "37" at 1865,1005.96 h30 r90; Top Overlay "28" at 1765,1005.96 h30 r90; Top Overlay "27" at 1665,1005.96 h30 r90; Top Overlay "77" at 3214.06,1305 h30; Top Overlay "87" at 3214.06,1405 h30; Top Overlay "76" at 3214.06,1505 h30; Top Overlay "86" at 3214.06,1605 h30; Top Overlay "65" at 3214.06,1705 h30; Top Overlay "75" at 3214.06,1805 h30; Top Overlay "85" at 3214.06,1905 h30; Top Overlay "84" at 3214.06,2005 h30; Top Overlay "74" at 3214.06,2105 h30; Top Overlay "64" at 3214.06,2205 h30; Top Overlay "83" at 3214.06,2305 h30; Top Overlay "73" at 3214.06,2405 h30; Top Overlay "63" at 3214.06,2505 h30; Top Overlay "82" at 3214.06,2605 h30; Top Overlay "54" at 3214.06,2705 h30; Top Overlay "45" at 1335.96,1205 h30; Top Overlay "17" at 1340.96,1305 h30; Top Overlay "36" at 1335.96,1405 h30; Top Overlay "26" at 1335.96,1505 h30; Top Overlay "16" at 1340.96,1605 h30; Top Overlay "35" at 1335.96,1705 h30; Top Overlay "25" at 1335.96,1805 h30; Top Overlay "15" at 1340.96,1905 h30; Top Overlay "14" at 1340.96,2005 h30; Top Overlay "24" at 1335.96,2105 h30; Top Overlay "34" at 1335.96,2205 h30; Top Overlay "13" at 1340.96,2305 h30; Top Overlay "23" at 1335.96,2405 h30; Top Overlay "12" at 1340.96,2505 h30; Top Overlay "22" at 1335.96,2605 h30; Top Overlay "11" at 1350.96,2705 h30; Top Overlay "18" at 1565,1010.96 h30 r90; Top Overlay "R81" at 3214.06,2805 h30; Top Overlay "R11" at 1465,2884.05 h30 r90